# Altium PCB MilliNut.PcbDoc
Units mm, origin at the board's own origin, x right, y up, seen from the top; angles counter-clockwise.
Board outline 32 x 50 mm, 2 copper layers (Top Layer, Bottom Layer); 20 components, 21 nets, 139 pads, 0 vias.
Unrouted connection lines stored in the file: 63.
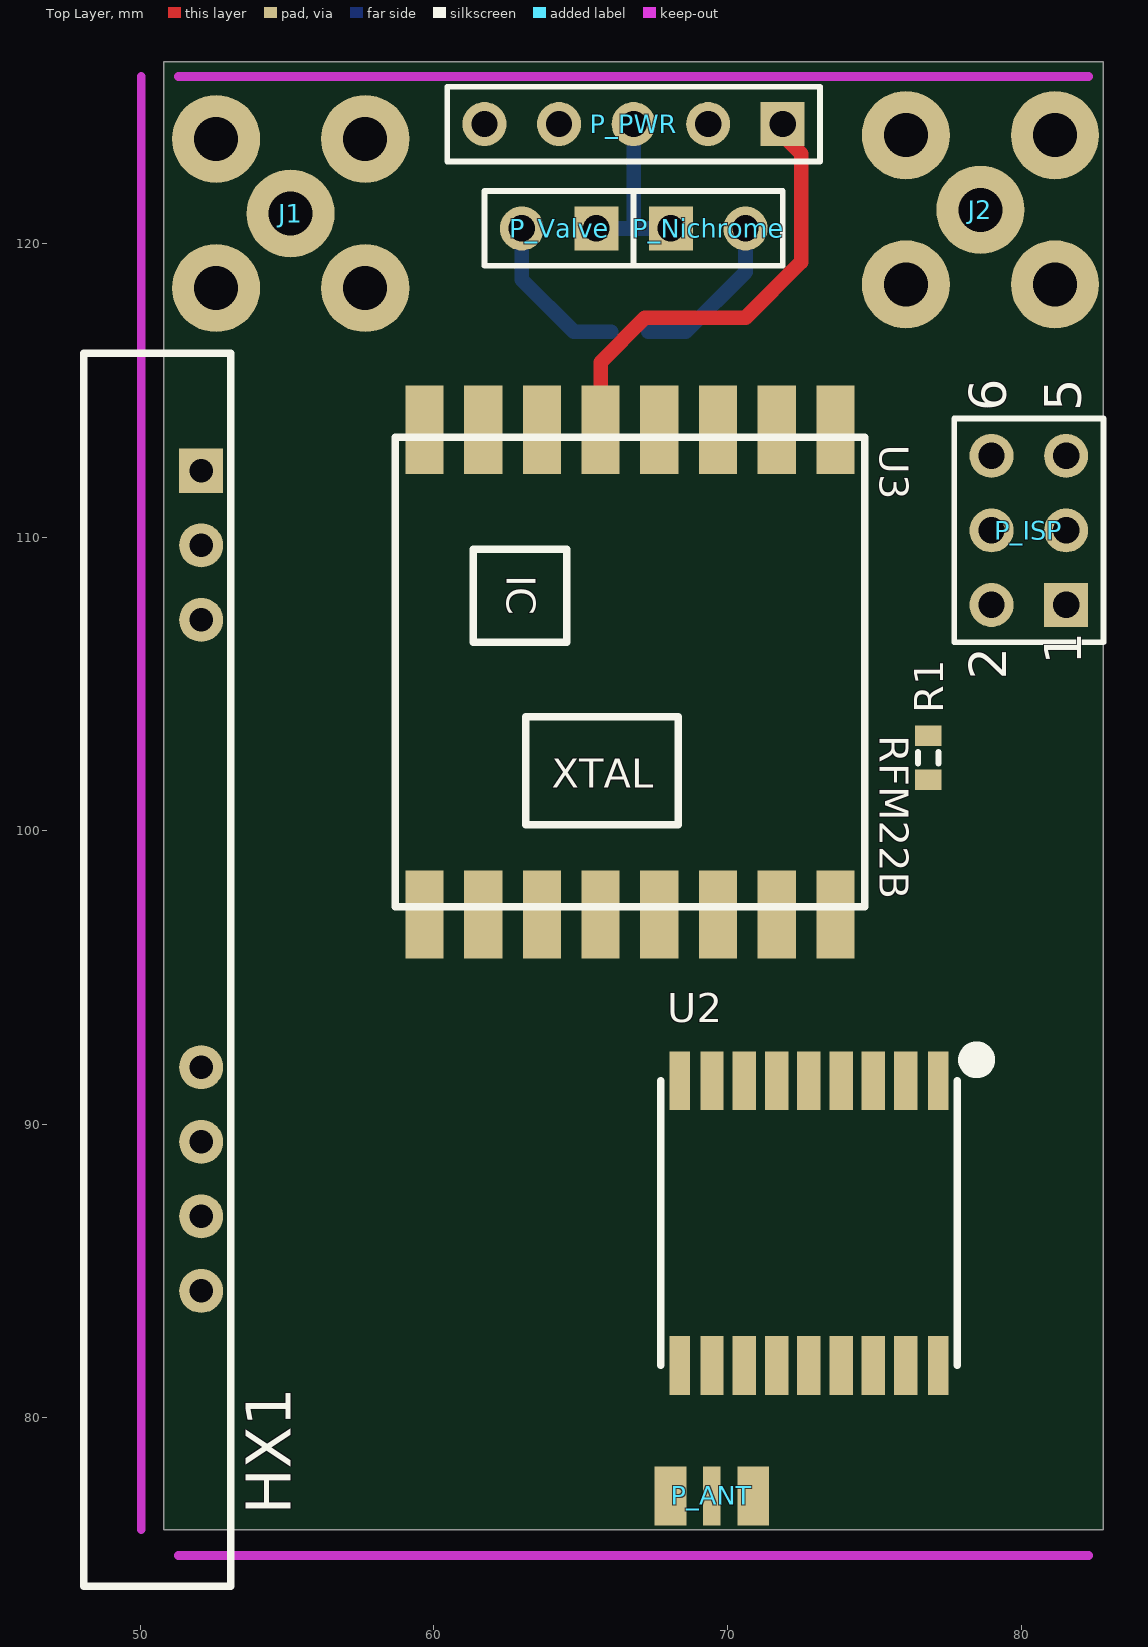
[diagram p0: Top Layer view]
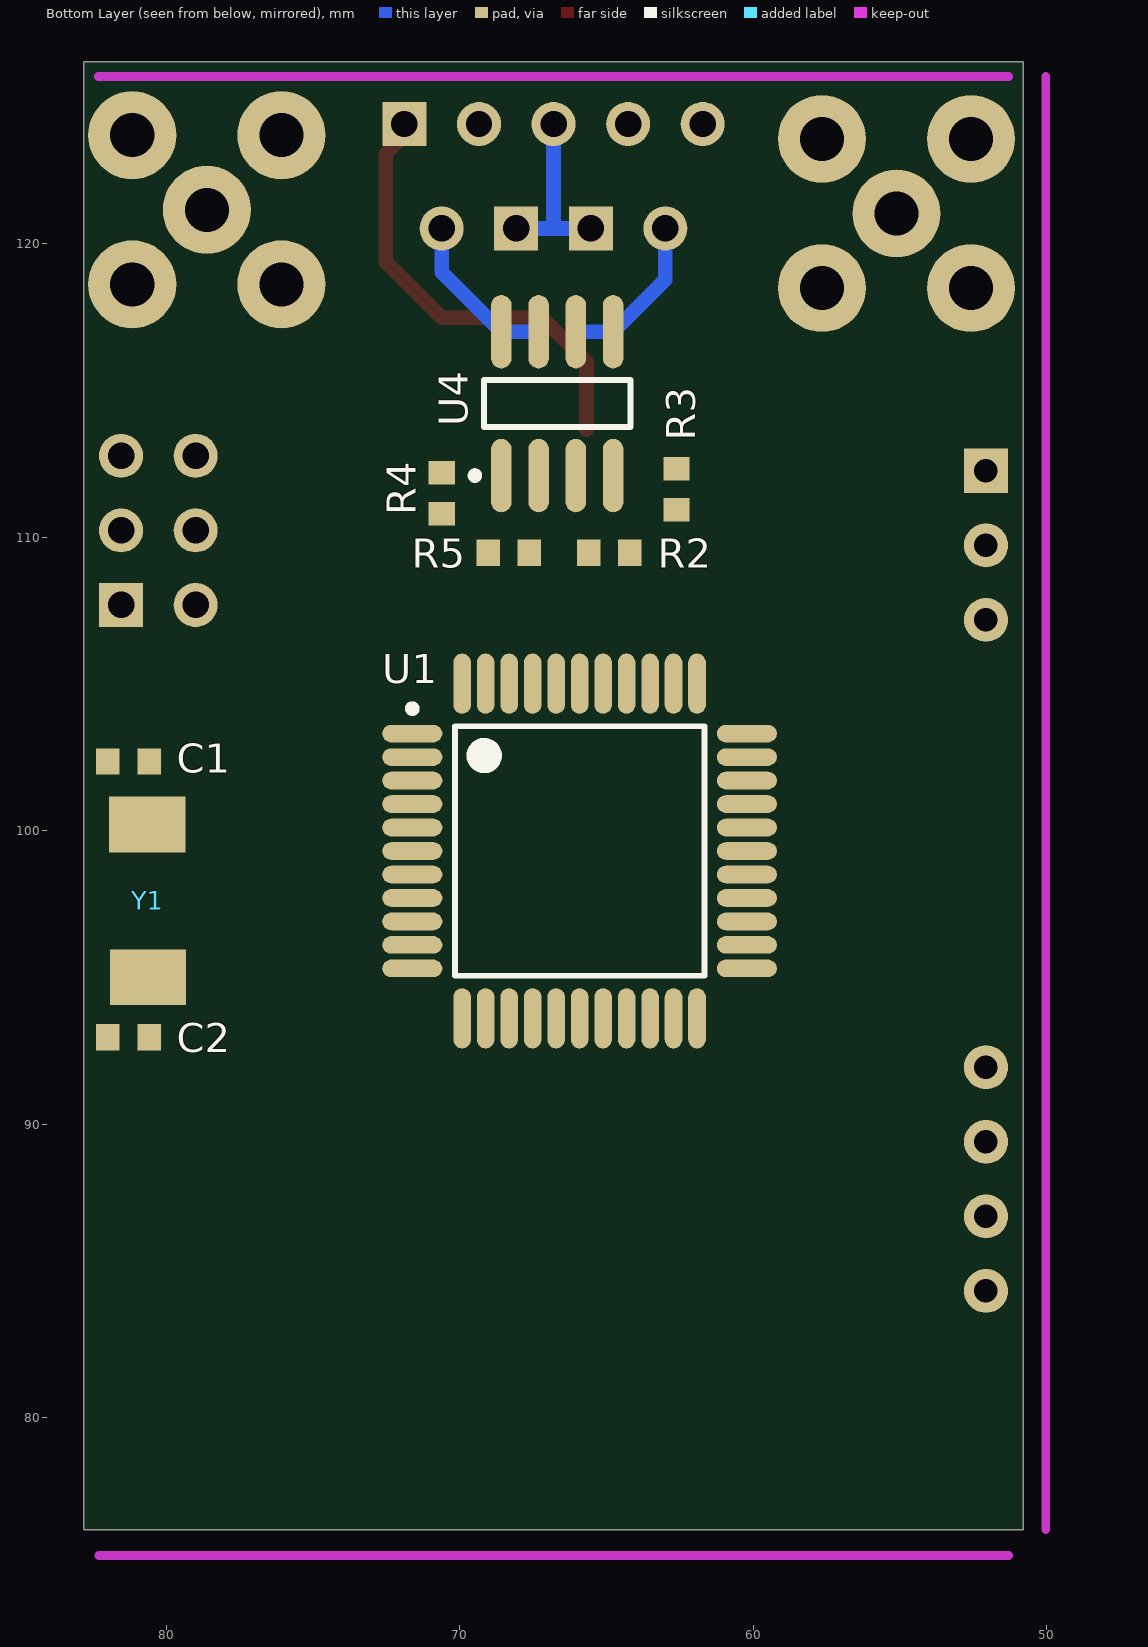
[diagram p1: Bottom Layer view, seen from below]

## Layer stack, top to bottom
Top Layer: signal copper 0.0356
Dielectric: dielectric 0.32, FR-4, Dk 4.8
Bottom Layer: signal copper 0.0356

## Board outline
50.8,76.2 82.8,76.2 82.8,126.2 50.8,126.2

## Design rules (kind name [scope] priority, off if disabled: settings)
Clearance [All] p1: gap=0.2
ComponentClearance [All] p1 off: gap=0.254 collisioncheckmode=3 verticalgap=0.254 showdistances=FALSE
PolygonConnect [All] p1: connectstyle=Relief reliefconductorwidth=0.254 reliefentries=4 polygonreliefangle="90 Angle"
RoutingVias [All] p1: holewidth=0.6 width=0.8 viastyle="Through Hole" minholewidth=0.711 minwidth=1.27 maxholewidth=0.711 maxwidth=1.27
SilkscreenOverComponentPads [All] p1: minsilkscreentomaskgap=0.254
SolderMaskExpansion [All] p1: expansion=0.102
Width [All] p1: maxlimit=3 minlimit=0.2 preferedwidth=0.3
26 further rules are at their usual default settings.

## Components (designator, comment, footprint, x,y, rotation, side; value= is the part's Value field where it differs from the comment)
C1 "C0805" 1608[0603] 81.28,102.362 r180 bottom
C2 "C0805" 1608[0603] 81.28,92.964 r180 bottom
HX1 "RadioMetrix NTX2/TX1H" HX1_Vertical 52.07,112.268 r270 top
J1 "SMA_L" "CON SMA PCB 90" 55.118,121.031 r90 top
J2 "SMA_L" "CON SMA PCB 90" 78.613,121.158 r270 top
P_ANT "Sarantel GeoHelix Antenna" "Sarantel SL1202RH" 69.469,77.343 r180 top
P_ISP "ISP" HDR2X3 81.534,107.696 r90 top
P_Nichrome "Header 2" HDR1X2 68.072,120.523 r0 top
P_PWR "Header 5" HDR1X5 71.88,124.079 r180 top
P_Valve "Header 2" HDR1X2 65.532,120.523 r180 top
R1 "Res3" J1-0603 76.835,102.489 r270 top
R2 "Res3" 1608[0603] 64.897,109.474 r180 bottom
R3 "Res3" 1608[0603] 62.611,111.633 r270 bottom
R4 "Res3" 1608[0603] 70.612,111.506 r90 bottom
R5 "Res3" 1608[0603] 68.326,109.474 r180 bottom
U1 "ATmega644A-AU" 44A_M 65.913,99.314 r180 bottom
U2 "uBlox MAX-6Q" MAX-6Q 72.771,81.788 r90 top
U3 "RFM22B" RFM22B 74.676,113.411 r270 top
U4 "FDS9926A" SO8_M 66.675,114.554 r90 bottom
Y1 "8MHz" ABM3_XTAL 80.518,99.314 r270 bottom

## Footprints (in the part's own frame and the unit in brackets; to place one, negate y for a bottom-side part, rotate by r counter-clockwise, add the part's x,y. Pads: shape width x height; smd on the part's side, far side on the other; paste and mask are expansions set on the pad)
44A_M [mm] "Thin QFP, 44-Leads, Body 10x10mm, Pitch 0.8mm, IPC Low Density"
  oval 2.05x0.6 smd: 1(-5.7,4) 2(-5.7,3.2) 3(-5.7,2.4) 4(-5.7,1.6) 5(-5.7,0.8) 6(-5.7,0) 7(-5.7,-0.8) 8(-5.7,-1.6) 9(-5.7,-2.4) 10(-5.7,-3.2) 11(-5.7,-4) 23(5.7,-4) 24(5.7,-3.2) 25(5.7,-2.4) 26(5.7,-1.6) 27(5.7,-0.8) 28(5.7,0) 29(5.7,0.8) 30(5.7,1.6) 31(5.7,2.4) 32(5.7,3.2) 33(5.7,4)
  oval 0.6x2.05 smd: 12(-4,-5.7) 13(-3.2,-5.7) 14(-2.4,-5.7) 15(-1.6,-5.7) 16(-0.8,-5.7) 17(0,-5.7) 18(0.8,-5.7) 19(1.6,-5.7) 20(2.4,-5.7) 21(3.2,-5.7) 22(4,-5.7) 34(4,5.7) 35(3.2,5.7) 36(2.4,5.7) 37(1.6,5.7) 38(0.8,5.7) 39(0,5.7) 40(-0.8,5.7) 41(-1.6,5.7) 42(-2.4,5.7) 43(-3.2,5.7) 44(-4,5.7)
  silkscreen extent -5.82,-4.25 4.25,4.97, body extent -5,-5 5,5, height 1.2
1608[0603] [mm] "Chip Capacitor, Body 1.6x0.8mm, IPC High Density"
  rect 0.8x0.9 smd: 1(-0.7,0) 2(0.7,0)
  body extent -0.87,-0.48 0.87,0.48, height 1.3
ABM3_XTAL [mm]
  rect 1.9x2.6 smd: 1(-0.9,-0.125) 2(4.3,-0.1)
  body extent -1.4,-1.95 4.8,1.75, height 1.34
"CON SMA PCB 90" [mm] "UofA Lib Pavel"
  round 3 hole 1.5: 1(0,0) 2(-2.54,-2.54) 2(-2.54,2.54) 2(2.54,-2.54) 2(2.54,2.54)
HDR1X2 [mm] "Connector; Header; 2 Position"
  rect 1.5x1.5 hole 0.9: 1(0,0)
  round 1.5 hole 0.9: 2(2.54,0)
  silkscreen extent -1.27,-1.27 3.81,1.27
HDR1X5 [mm] "Connector; Header; 5 Position"
  rect 1.5x1.5 hole 0.9: 1(0,0)
  round 1.5 hole 0.9: 2(2.54,0) 3(5.08,0) 4(7.62,0) 5(10.16,0)
  silkscreen extent -1.27,-1.27 11.43,1.27
HDR2X3 [mm] "Connector; Header; 3x2 Position"
  rect 1.5x1.5 hole 0.9: 1(0,0)
  round 1.5 hole 0.9: 2(0,2.54) 3(2.54,0) 4(2.54,2.54) 5(5.08,0) 6(5.08,2.54)
  silkscreen extent -1.27,-1.27 6.35,3.81
HX1_Vertical [mm]
  rect 1.5x1.5 hole 0.8: 1(0,0)
  round 1.5 hole 0.8: 2(2.54,0) 3(5.08,0) 4(20.32,0) 5(22.86,0) 6(25.4,0) 7(27.94,0)
  silkscreen extent -4,-4 38,1
J1-0603 [mm] "Chip Resistor, Body 1.6x0.8mm, IPC High Density"
  rect 0.7x0.9 smd: 1(-0.75,0) 2(0.75,0)
  silkscreen extent -0.2,-0.35 0.2,0.35, body extent -0.85,-0.48 0.85,0.48, height 0.9
MAX-6Q [mm]
  rect 2x0.7 smd: 1(9.7,-4.4) 9(9.7,4.4) 10(0,4.4) 18(0,-4.4)
  rect 2x0.8 smd: 2(9.7,-3.3) 3(9.7,-2.2) 4(9.7,-1.1) 5(9.7,0) 6(9.7,1.1) 7(9.7,2.2) 8(9.7,3.3) 11(0,3.3) 12(0,2.2) 13(0,1.1) 14(0,0) 15(0,-1.1) 16(0,-2.2) 17(0,-3.3)
  silkscreen extent 0,-5.84 10.54,5.05
RFM22B [mm]
  rect 3x1.3 smd: 1(-0.254,-1) 2(-0.254,-3) 3(-0.254,-5) 4(-0.254,-7) 5(-0.254,-9) 6(-0.254,-11) 7(-0.254,-13) 8(-0.254,-15) 9(16.256,-15) 10(16.256,-13) 11(16.256,-11) 12(16.256,-9) 13(16.256,-7) 14(16.256,-5) 15(16.256,-3) 16(16.256,-1)
  silkscreen extent 0,-16 16,0
"Sarantel SL1202RH" [mm]
  rect 0.6x2 smd: 1(0,0) 2(-1.651,0) 2(-1.17,0) 3(1.17,0) 3(1.651,0)
  Mechanical 1 keep-out lines w0.254: -1.988,1.143 cw(c-3.788,1.143) -5.588,1.143
  body extent -6.61,-6.65 6.66,22.85, height 6.82
SO8_M [mm] "SOIC, 8-Leads, Body 4.9x3.9mm, Pitch 1.27mm, IPC Low Density"
  oval 2.5x0.7 smd: 1(-2.45,1.905) 2(-2.45,0.635) 3(-2.45,-0.635) 4(-2.45,-1.905) 5(2.45,-1.905) 6(2.45,-0.635) 7(2.45,0.635) 8(2.45,1.905)
  silkscreen extent -2.57,-2.5 0.8,2.93, body extent -2,-2.5 2,2.5, height 1.75

## Part data
C1 C2: "Ceramic Chip Capacitor - Standard"
J1 J2: "Power Connector"
P_ISP: library part "Header 3X2", "Header, 3-Pin, Dual row"
P_Nichrome P_Valve: "Header, 2-Pin"
P_PWR: "Header, 5-Pin"
R1 R2 R3 R4 R5: "Resistor"
U1: "8-bit AVR Microcontroller, 64KB Flash, 2KB EEPROM, 4KB SRAM, 44-pin TQFP, Industrial Grade (-40°C to 85°C)"
U3: library part RFM22B-S2
Y1: library part ECS-110-S-1, "Crystal Oscillator"

## Nets (pads, with @x,y where several pads share a name; then routed paths per layer and width w, separated by ;. In a path a pad name is that pad's centre, name@x,y a point inside that pad or via, vN(x,y) a via of type N, cw(c..) or ccw(c..) an arc to the next point about the centre after c; other vN are vias at no path point)
3V3: P_ISP.2 P_PWR.1 R1.2 U1.5 U1.17 U1.27 U1.38 U2.6 U2.7 U2.8 U3.5 | length 15.5
  Top Layer w0.5: U3.5 65.676,115.968 67.183,117.475 70.612,117.475 72.517,119.38 72.517,123.063 71.88,123.7 P_PWR.1
5V: HX1.5 P_PWR.5
GND: C1.1 C2.1 HX1.1 HX1.3 HX1.6 J1.2 J2.2 P_ANT.2 P_ANT.3 P_ISP.6 P_PWR.2 P_PWR.4 R2.1 R4.2 U1.6 U1.18 U1.28 U1.39 U2.1 U2.10 U2.12 U3.2 U3.9 U3.15 U3.16 U4.1 U4.3
MISO: P_ISP.1 U1.2 U3.10
MOSI: P_ISP.4 U1.1 U3.11
NetC1_2: C1.2 U1.7 Y1.1
NetC2_2: C2.2 U1.8 Y1.2
NetHX1_2: HX1.2 J1.1
NetJ2_1: J2.1 U3.1
NetP_ANT_1: P_ANT.1 U2.11
NetP_Nichrome_2: P_Nichrome.2 U4.7 U4.8 | length 5.6
  Bottom Layer w0.5: U4.7 U4.8 70.612,119.036 P_Nichrome.2
NetP_Valve_2: P_Valve.2 U4.5 U4.6 | length 5.5
  Bottom Layer w0.5: P_Valve.2 62.992,118.782 U4.5 U4.6
NetR2_2: R2.2 R3.2
NetR3_1: R3.1 U4.4
NetR4_1: R4.1 R5.1
NetR5_2: R5.2 U4.2
NetU3_3: U3.3 U3.7
NetU3_4: U3.4 U3.6
RST: P_ISP.5 R1.1 U1.4
SCK: P_ISP.3 U1.3 U3.12
VBATT: P_Nichrome.1 P_PWR.3 P_Valve.1 | length 6.1
  Bottom Layer w0.5: P_Valve.1 66.675,120.523 ; P_PWR.3 66.8,120.648 66.675,120.523 ; P_Nichrome.1 66.675,120.523
pads on no net: HX1.4 HX1.7 U1.9 U1.10 U1.11 U1.12 U1.13 U1.14 U1.15 U1.16 U1.19 U1.20 U1.21 U1.22 U1.23 U1.24 U1.25 U1.26 U1.29 U1.30 U1.31 U1.32 U1.33 U1.34 U1.35 U1.36 U1.37 U1.40 U1.41 U1.42 U1.43 U1.44 U2.2 U2.3 U2.4 U2.5 U2.9 U2.13 U2.14 U2.15 U2.16 U2.17 U2.18 U3.8 U3.13 U3.14

## Keep-outs
Keep-Out Layer:
  lines w0.3: 50.03,76.2 50.03,125.7 ; 51.296,75.311 82.296,75.311 ; 51.3,125.7 82.3,125.7

## Silkscreen, mask and mechanical layers (free items; w line width, h text height)
Drill Drawing:
  text ".LEGEND" at 87.88,81.28 h1.52
  text "Drill Drawing." at 87.88,78.74 h1.52

## Dimensions
50.03,76.2 to 50.03,125.7 on Mechanical 1
51.3,76.7 to 82.3,76.7 on Mechanical 1

## Text inside footprints (layer, text, board x,y; h text height)
P_ISP: Top Overlay "6" at 79.502,114.3 h1.27 r90; Top Overlay "5" at 82.042,114.3 h1.27 r90; Top Overlay "2" at 79.502,105.156 h1.27 r90; Top Overlay "1" at 82.042,105.664 h1.27 r90
U3: Top Overlay "XTAL" at 64.008,101.473 h1; Top Overlay "IC" at 62.484,108.712 h1 r270